# EAGLE board carte Rpi (EAGLE 6.1)
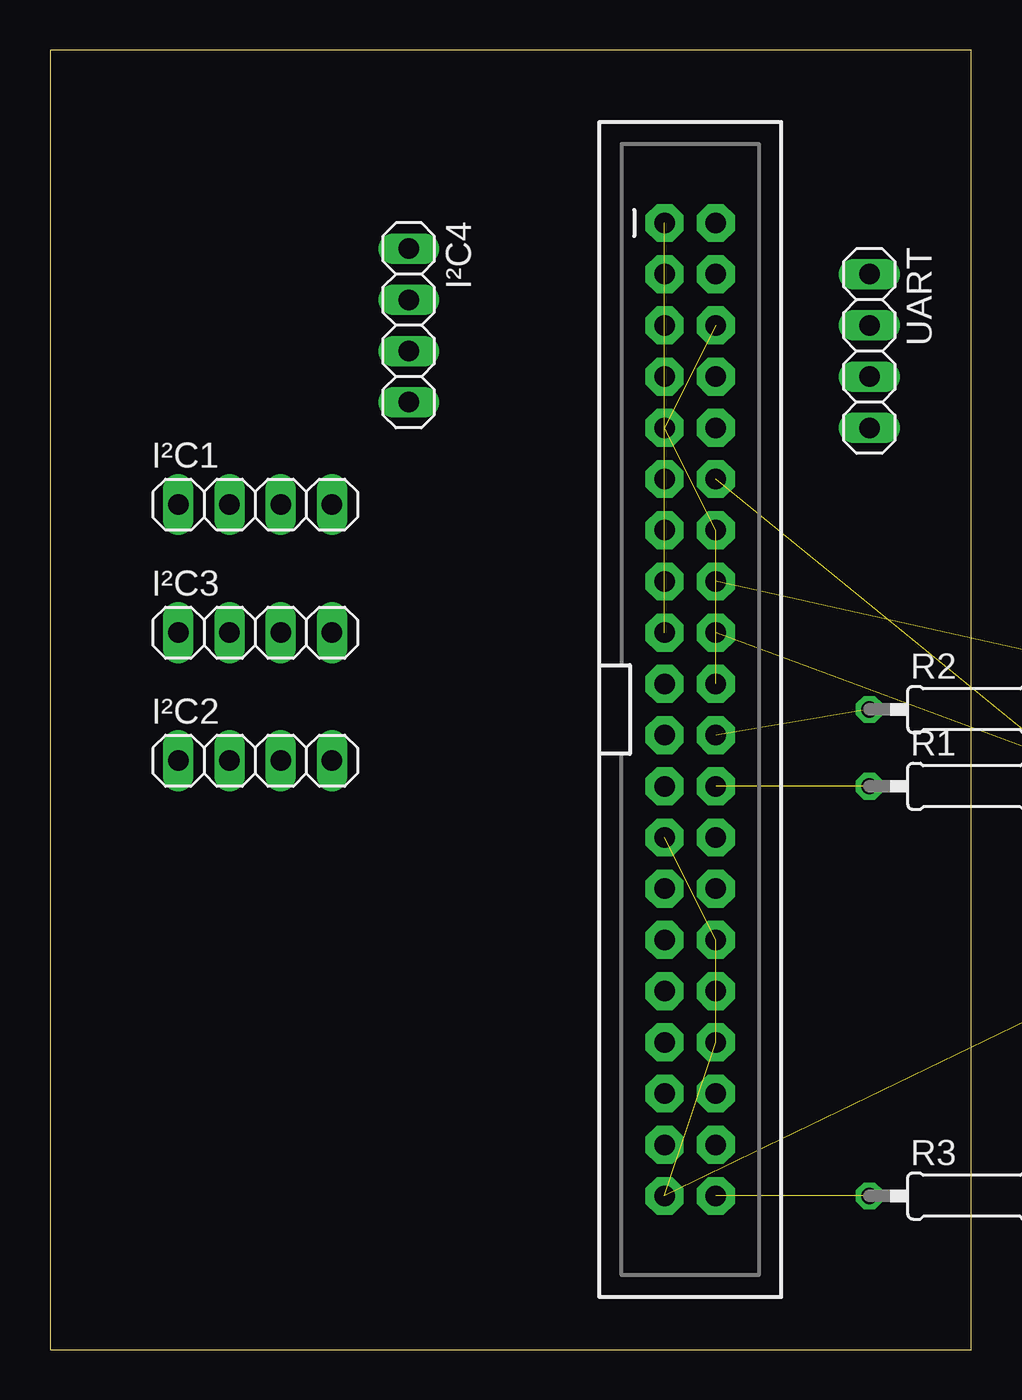
[diagram p0: board, top side]
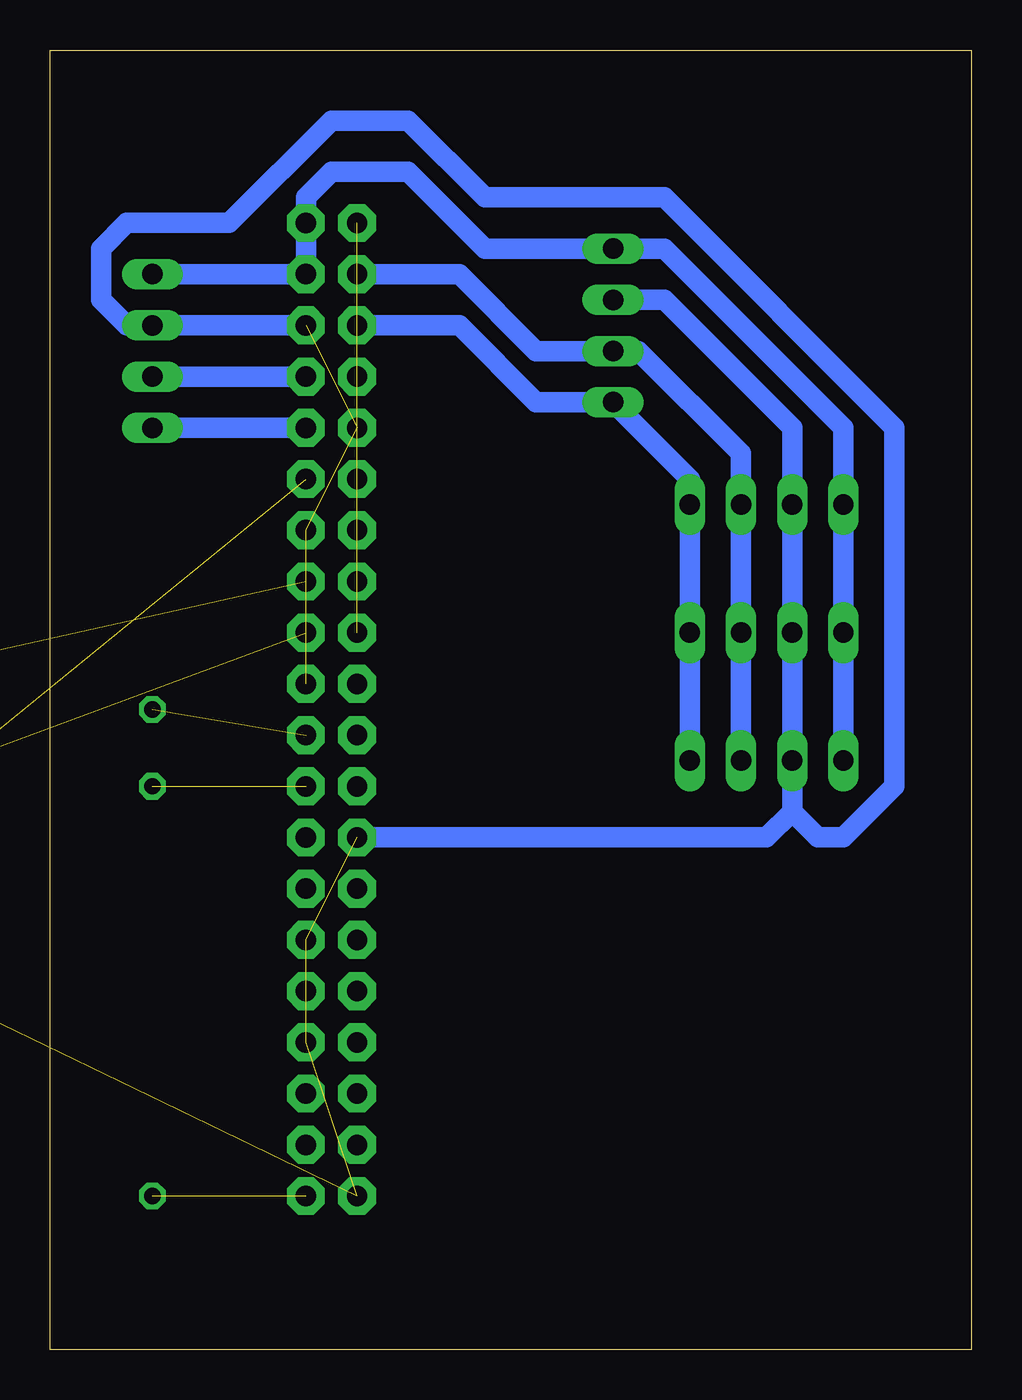
[diagram p1: board, bottom side, seen from below]

Size 45.7 x 64.44 mm. Coordinates in mm from the lower left corner, seen from the top.
Outline: 0,0 45.7,0 45.7,64.44 0,64.44 0,0
Copper layers (1*16): Top 0.035mm / dielectric 1.5mm / Bottom 0.035mm
Design rules: minimum track width 10mil, minimum drill 24mil, track to track 8mil, track to pad 8mil, pad to pad 8mil, via to via 8mil, smd to smd 8mil, copper to edge 40mil, drill to drill 8mil, minimum pad ring 10mil, minimum via ring 8mil, stop-mask expansion 4mil, vias tented up to drill 0mil, thermal gap 10mil

## Footprints (pad centres in the part's own frame; a part is rotated, then mirrored left to right if it is on the bottom)
1X04 = drill 1.016 long: 1 -3.81,0; 2 -1.27,0; 3 1.27,0; 4 3.81,0
2X20-SHROUDED = drill 1.016 pad 1.88 octagon: 1 -1.27,24.13; 2 1.27,24.13; 3 -1.27,21.59; 4 1.27,21.59; 5 -1.27,19.05; 6 1.27,19.05; 7 -1.27,16.51; 8 1.27,16.51; 9 -1.27,13.97; 10 1.27,13.97; 11 -1.27,11.43; 12 1.27,11.43; 13 -1.27,8.89; 14 1.27,8.89; 15 -1.27,6.35; 16 1.27,6.35; 17 -1.27,3.81; 18 1.27,3.81; 19 -1.27,1.27; 20 1.27,1.27; 21 -1.27,-1.27; 22 1.27,-1.27; 23 -1.27,-3.81; 24 1.27,-3.81; 25 -1.27,-6.35; 26 1.27,-6.35; 27 -1.27,-8.89; 28 1.27,-8.89; 29 -1.27,-11.43; 30 1.27,-11.43; 31 -1.27,-13.97; 32 1.27,-13.97; 33 -1.27,-16.51; 34 1.27,-16.51; 35 -1.27,-19.05; 36 1.27,-19.05; 37 -1.27,-21.59; 38 1.27,-21.59; 39 -1.27,-24.13; 40 1.27,-24.13
0207/10 = drill 0.813 octagon: 1 -5.08,0; 2 5.08,0
MA08-1 = drill 1.016 long: 1 -8.89,0; 2 -6.35,0; 3 -3.81,0; 4 -1.27,0; 5 1.27,0; 6 3.81,0; 7 6.35,0; 8 8.89,0

## Placement (x,y rotation side)
I²C1  [1X04]  10.16,41.91 0 top
I²C2  [1X04]  10.16,29.21 0 top
I²C3  [1X04]  10.16,35.56 0 top
I²C4  [1X04]  17.78,50.8 270 top
J1  RASPBERRYPI-40-PIN-GPIO  [2X20-SHROUDED]  31.75,31.75 0 top
R1  120  [0207/10]  45.72,27.94 0 top
R2  180  [0207/10]  45.72,31.75 0 top
R3  120  [0207/10]  45.72,7.62 0 top
SV1  [MA08-1]  67.31,21.59 270 top  (outside the outline)
UART  [1X04]  40.64,49.53 270 top

## Library data of the parts
I²C1-I²C4 UART = pinhead
J1 = SparkFun-Boards
R1-R3 = rcl
SV1 = con-lstb; OC_FARNELL: unknown; OC_NEWARK: unknown

## Nets
3.3V: J1.1 J1.17
5V: I²C1.1 I²C2.1 I²C3.1 I²C4.1 J1.2 J1.4 UART.1
GND: I²C1.2 I²C2.2 I²C3.2 I²C4.2 J1.6 J1.9 J1.14 J1.20 J1.25 J1.30 J1.34 J1.39 SV1.3 UART.2
LED_BLUE: R3.2 SV1.5
LED_GREEN: R1.2 SV1.6
LED_RED: R2.2 SV1.2
N$1: J1.24 R1.1
N$4: J1.22 R2.1
N$5: J1.40 R3.1
PULL_UP_BUTTON1: J1.18 SV1.4
PULL_UP_BUTTON2: J1.12 SV1.7
PULL_UP_TIRETTE: J1.16 SV1.1
RX: J1.10 UART.4
SCL: I²C1.4 I²C2.4 I²C3.4 I²C4.4 J1.5
SDA: I²C1.3 I²C2.3 I²C3.3 I²C4.3 J1.3
TX: J1.8 UART.3

## Tracks (layer width: path | path; a pad name or v marks a point on that pad's centre or on a via)
3.3V  (1 unrouted)
5V
  Bottom 1.016: I²C2.1 I²C3.1 I²C1.1 6.35,45.72 15.24,54.61 I²C4.1 24.13,54.61 27.94,58.42 31.75,58.42 33.02,57.15 J1.2 J1.4 UART.1
GND  (7 unrouted)
  Bottom 1.016: I²C4.2 15.24,52.07 8.89,45.72 I²C1.2 I²C3.2 I²C2.2 8.89,26.67 | J1.25 10.16,25.4 8.89,26.67 | J1.6 UART.2 41.91,50.8 43.18,52.07 43.18,54.61 41.91,55.88 36.83,55.88 31.75,60.96 27.94,60.96 24.13,57.15 15.24,57.15 3.81,45.72 3.81,27.94 6.35,25.4 7.62,25.4 8.89,26.67
LED_BLUE  (1 unrouted)
LED_GREEN  (1 unrouted)
LED_RED  (1 unrouted)
N$1  (1 unrouted)
N$4  (1 unrouted)
N$5  (1 unrouted)
PULL_UP_BUTTON1  (1 unrouted)
PULL_UP_BUTTON2  (1 unrouted)
PULL_UP_TIRETTE  (1 unrouted)
RX
  Bottom 1.016: UART.4 J1.10
SCL
  Bottom 1.016: J1.5 25.4,50.8 21.59,46.99 I²C4.4 13.97,43.18 I²C1.4 I²C3.4 I²C2.4
SDA
  Bottom 1.016: J1.3 25.4,53.34 21.59,49.53 I²C4.3 16.51,49.53 11.43,44.45 I²C1.3 I²C3.3 I²C2.3
TX
  Bottom 1.016: J1.8 UART.3